# EAGLE board NanoDemultiplexerAndSDcard12Volts (EAGLE 9.5.2)
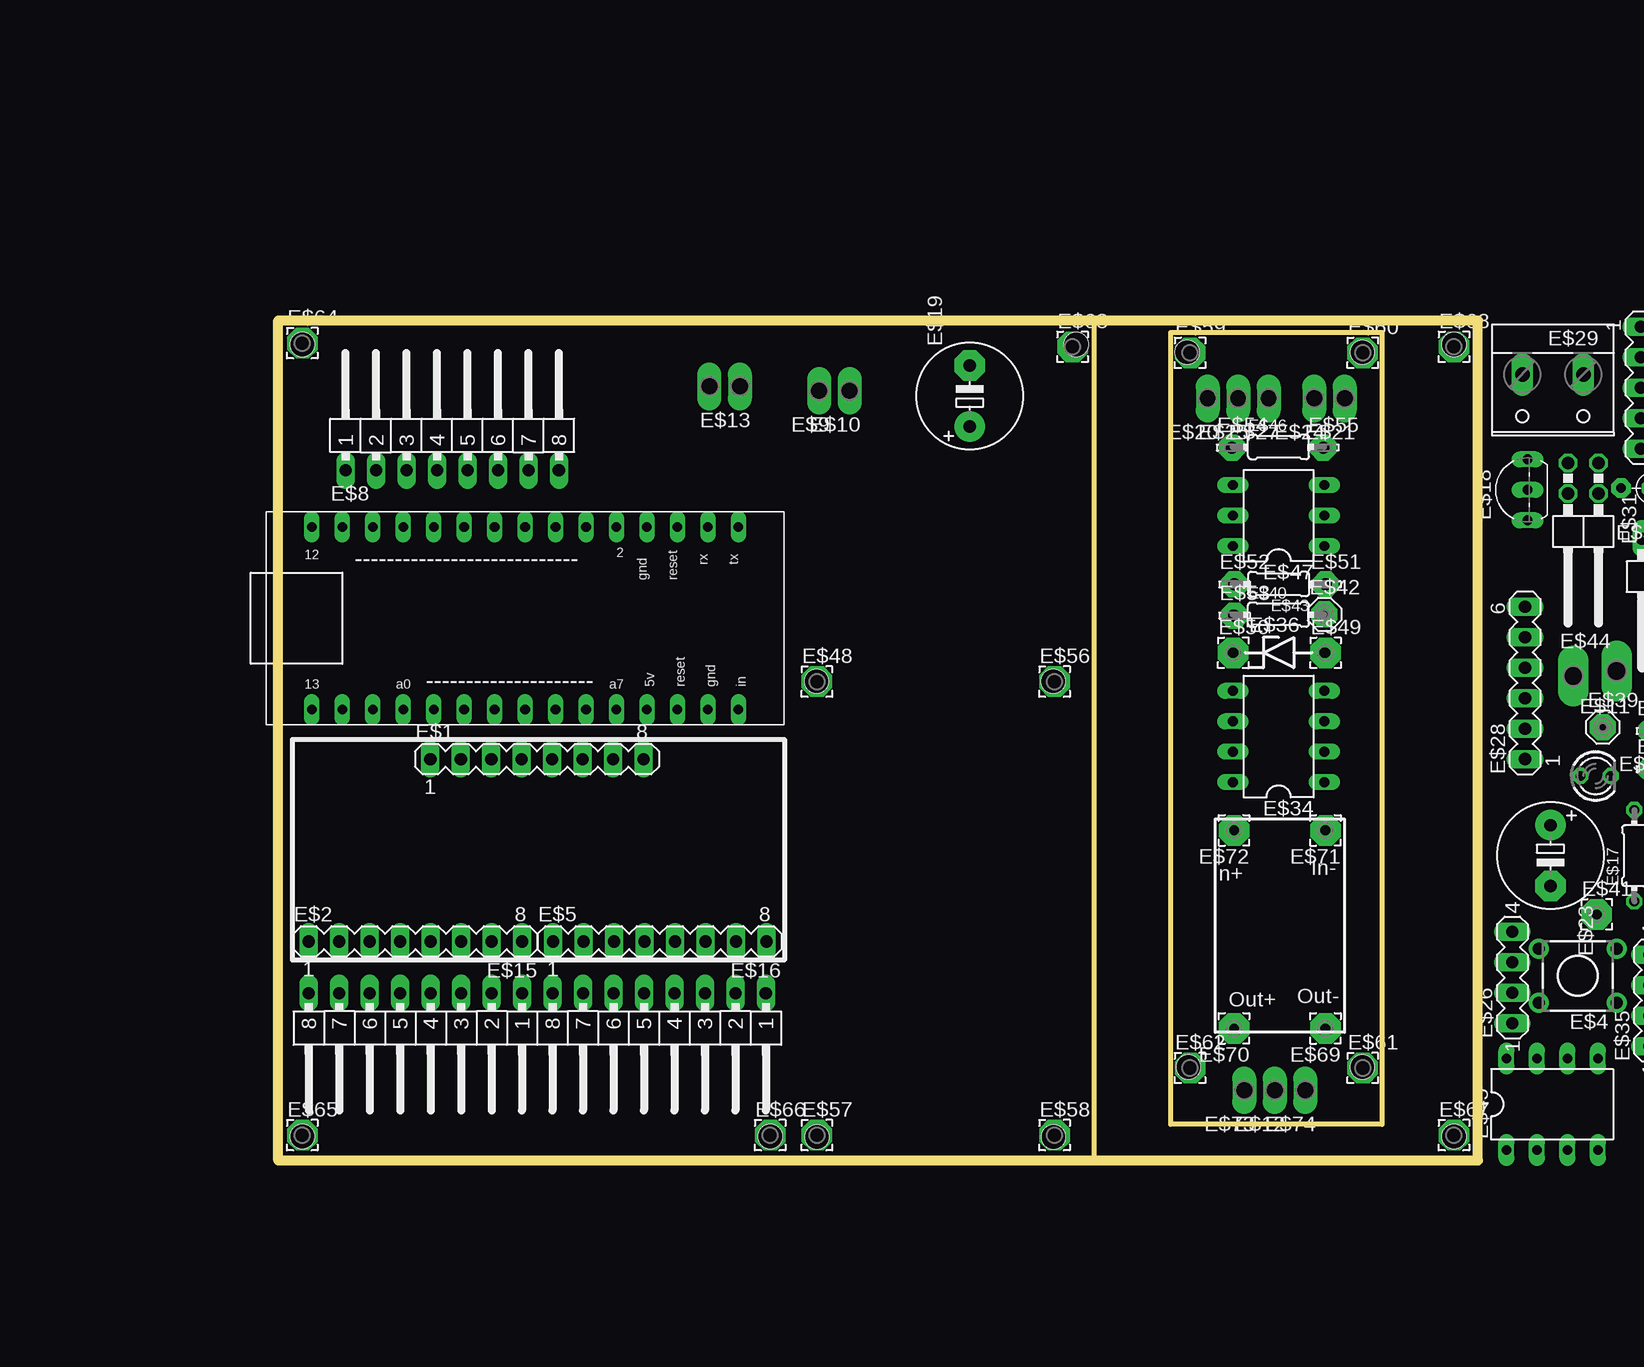
[diagram p0: board, top side]
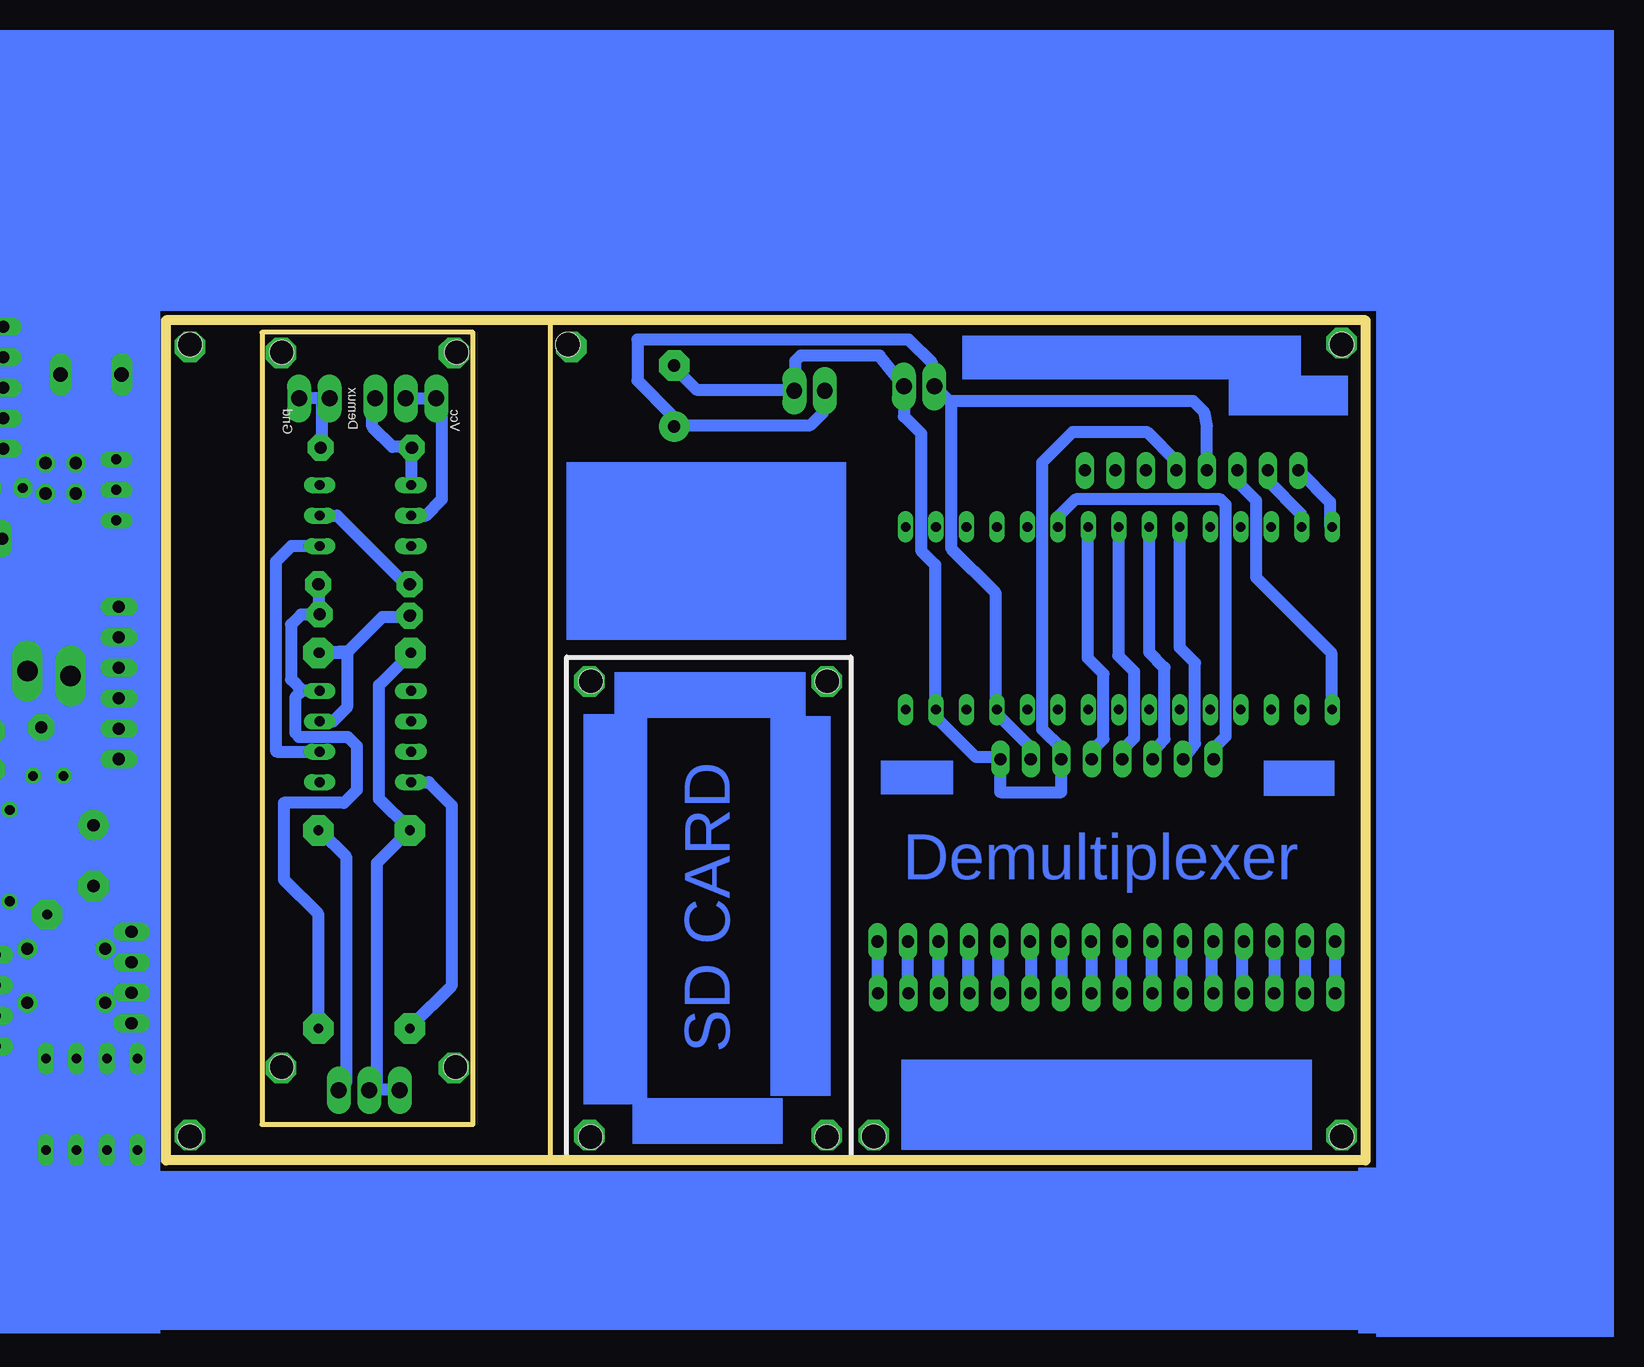
[diagram p1: board, bottom side, seen from below]

Size 100 x 70 mm. Coordinates in mm from the lower left corner, seen from the top.
Outline: 68,70 68,0
Outline: 0,0 0,70 100,70 100,0 0,0
Outline: 74.4,69 92,69 92,3 74.4,3 74.4,69
Copper layers (1*16): Top 0.035mm / dielectric 1.5mm / Bottom 0.035mm
Design rules "default": minimum track width 10mil, minimum drill 24mil, track to track 8mil, track to pad 8mil, pad to pad 8mil, via to via 8mil, smd to smd 8mil, copper to edge 40mil, drill to drill 8mil, minimum pad ring 10mil, minimum via ring 8mil, stop-mask expansion 4mil, vias tented up to drill 0mil, thermal gap 10mil
Holes 2 mm at 64.59,39.94 64.6,1.95 44.9,1.95 44.87,39.94 2,68 2,2 98,68 75.86,7.79 90.36,7.79 90.36,67.34 75.76,67.34 98,2 66.5,68 41,2

## Footprints (pad centres in the part's own frame; a part is rotated, then mirrored left to right if it is on the bottom)
MA08-1 = drill 1.016 long: 1 -8.89,0; 2 -6.35,0; 3 -3.81,0; 4 -1.27,0; 5 1.27,0; 6 3.81,0; 7 6.35,0; 8 8.89,0
MA05-1 = drill 1.016 long: 1 -5.08,0; 2 -2.54,0; 3 0,0; 4 2.54,0; 5 5.08,0
TL1105 = drill 1 pad 1.676: 1 -2.25,3.25; 2 2.25,3.25; 3 -2.25,-3.25; 4 2.25,-3.25
LED3MM = drill 0.813 octagon: A -1.27,0; K 1.27,0
ARDUINO-NANO = drill 0.8 long: P$2 -17.78,7.62; P$4 -15.24,7.62; P$5 -12.7,7.62; P$8 -10.16,7.62; P$9 -7.62,7.62; P$12 -5.08,7.62; P$13 -2.54,7.62; P$16 0,7.62; P$17 2.54,7.62; P$20 5.08,7.62; P$21 7.62,7.62; P$24 10.16,7.62; P$25 12.7,7.62; P$28 15.24,7.62; P$29 17.78,7.62; P$31 -17.78,-7.62; P$34 -15.24,-7.62; P$35 -12.7,-7.62; P$38 -10.16,-7.62; P$39 -7.62,-7.62; P$42 -5.08,-7.62; P$43 -2.54,-7.62; P$46 0,-7.62; P$47 2.54,-7.62; P$50 5.08,-7.62; P$51 7.62,-7.62; P$54 10.16,-7.62; P$55 12.7,-7.62; P$58 15.24,-7.62; P$59 17.78,-7.62
MA08-1W = drill 1.016 long: 1 -8.89,0; 2 -6.35,0; 3 -3.81,0; 4 -1.27,0; 5 1.27,0; 6 3.81,0; 7 6.35,0; 8 8.89,0
P1-13Y = drill 1.321 pad 1.905 long: TP 0,0
P1-17Y = drill 1.702 pad 2.121 long: TP 0,0
0204/7 = drill 0.813 octagon: 1 -3.81,0; 2 3.81,0
TO92- = drill 0.813 long: 1 2.54,0; 2 0,0; 3 -2.54,0
E5-8,5 = drill 1.016 pad 2.54: + -2.54,0 | drill 1.016 pad 2.54 octagon: - 2.54,0
1X01/90 = drill 1.016 long: 1 -1.27,-3.81
MA04-1 = drill 1.016 long: 1 -3.81,0; 2 -1.27,0; 3 1.27,0; 4 3.81,0
MA06-1 = drill 1.016 long: 1 -6.35,0; 2 -3.81,0; 3 -1.27,0; 4 1.27,0; 5 3.81,0; 6 6.35,0
W237-132 = drill 1.194 long: 1 -2.54,-0.635; 2 2.54,-0.635
RS-2,5 = drill 0.813 pad 1.6 octagon: 1 -1.27,0; 2 1.27,0
2X02/90 = drill 1.016 octagon: 1 -1.27,-6.35; 2 -1.27,-3.81; 3 1.27,-6.35; 4 1.27,-3.81
DIL08 = drill 0.813 long: 1 -3.81,-3.81; 2 -1.27,-3.81; 3 1.27,-3.81; 4 3.81,-3.81; 5 3.81,3.81; 6 1.27,3.81; 7 -1.27,3.81; 8 -3.81,3.81
ZDIO-7.5 = drill 0.813 octagon: A 3.81,0; C -3.81,0
LSP10 = drill 1.016 pad 2.159 octagon: MP 0,0
LSP11 = drill 1.118 pad 2.159 octagon: MP 0,0
MCS10B = drill 1.016 pad 2.159 octagon: MP 0,0
2,54/0,8 = drill 0.813 pad 2.54 octagon: 1 0,0
DIL06 = drill 0.813 long: 1 -2.54,-3.81; 2 0,-3.81; 3 2.54,-3.81; 4 2.54,3.81; 5 0,3.81; 6 -2.54,3.81

## Placement (x,y rotation side)
E$1  [MA08-1]  21.56,33.44 0 top
E$2  [MA08-1]  11.43,18.24 0 top
E$3  [MA05-1]  113.58,64.38 270 top  (outside the outline)
E$4  [TL1105]  108.32,15.38 90 top  (outside the outline)
E$5  [MA08-1]  31.79,18.24 0 top
E$6  [LED3MM]  109.81,32.04 0 top  (outside the outline)
E$7  [ARDUINO-NANO]  20.57,45.18 0 top
E$8  [MA08-1W]  14.5,57.5 0 top
E$9  [P1-13Y]  45.09,64.14 180 top
E$10  [P1-13Y]  47.62,64.14 180 top
E$11  [P1-17Y]  111.55,40.79 180 top  (outside the outline)
E$12  [P1-13Y]  83.06,5.84 180 top
E$13  [P1-13Y]  38.48,64.5 180 top
E$14  [P1-13Y]  35.94,64.5 0 top
E$15  [MA08-1W]  11.43,13.94 180 top
E$16  [MA08-1W]  31.75,13.94 180 top
E$17  [0204/7]  113.03,25.4 90 top  (outside the outline)
E$18  [TO92-]  104.14,55.88 90 top  (outside the outline)
E$19  1000uF  [E5-8,5]  57.63,63.7 90 top
E$20  [P1-13Y]  77.47,63.5 180 top
E$21  [P1-13Y]  88.9,63.5 180 top
E$22  [1X01/90]  112.39,48.01 180 top  (outside the outline)
E$23  [E5-8,5]  106.05,25.4 270 top  (outside the outline)
E$24  [P1-13Y]  86.36,63.5 180 top
E$25  [P1-13Y]  80.01,63.5 180 top
E$26  [MA04-1]  102.87,15.24 90 top
E$27  [P1-13Y]  82.55,63.5 180 top
E$28  [MA06-1]  103.93,39.79 90 top  (outside the outline)
E$29  [W237-132]  106.25,64.85 180 top  (outside the outline)
E$30  [RS-2,5]  113.2,56.03 180 top  (outside the outline)
E$31  [2X02/90]  108.78,51.77 180 top  (outside the outline)
E$34  Attiny85  [DIL08]  83.38,35.33 90 top
E$35  [MA04-1]  114.3,13.34 90 top  (outside the outline)
E$36  zener 2.4  [ZDIO-7.5]  83.38,42.31 0 top
E$37  [LSP10]  114.5,35.8 0 top  (outside the outline)
E$38  [LSP11]  114.5,32.6 0 top  (outside the outline)
E$39  [MCS10B]  110.4,36.1 0 top  (outside the outline)
E$40  1k  [0204/7]  83.38,45.48 0 top
E$41  [2,54/0,8]  109.9,20.5 0 top  (outside the outline)
E$42  [MCS10B]  87.2,45.5 0 top
E$43  220  [0204/7]  83.38,48.02 180 top
E$44  [P1-17Y]  107.95,40.37 0 top  (outside the outline)
E$45  [DIL08]  106.19,4.68 0 top
E$46  220  [0204/7]  83.38,59.45 0 top
E$47  Til113  [DIL06]  83.38,53.74 90 top
E$48  [2,54/0,8]  44.9,39.9 0 top
E$49  [2,54/0,8]  87.3,42.3 0 top
E$50  [2,54/0,8]  79.61,42.3 0 top
E$51  [LSP10]  87.3,48 0 top
E$52  [LSP10]  79.7,48 0 top
E$53  [LSP10]  79.7,45.4 0 top
E$54  [LSP10]  79.5,59.4 0 top
E$55  [LSP10]  87.1,59.4 0 top
E$56  [2,54/0,8]  64.7,39.9 0 top
E$57  [2,54/0,8]  44.9,2.1 0 top
E$58  [2,54/0,8]  64.7,2.1 0 top
E$59  [2,54/0,8]  76,67.3 0 top
E$60  [2,54/0,8]  90.4,67.3 0 top
E$61  [2,54/0,8]  90.4,7.7 0 top
E$62  [2,54/0,8]  76,7.7 0 top
E$63  [2,54/0,8]  66.2,67.8 0 top
E$64  [2,54/0,8]  2,68.1 0 top
E$65  [2,54/0,8]  2,2.1 0 top
E$66  [2,54/0,8]  41,2.1 0 top
E$67  [2,54/0,8]  98,2.1 0 top
E$68  [2,54/0,8]  98,67.8 0 top
E$69  [2,54/0,8]  87.29,10.99 180 top
E$70  [2,54/0,8]  79.67,10.99 180 top
E$71  [2,54/0,8]  87.29,27.5 180 top
E$72  [2,54/0,8]  79.67,27.5 180 top
E$73  [P1-13Y]  80.52,5.84 180 top
E$74  [P1-13Y]  85.6,5.84 180 top

## Library data of the parts
E$1-E$3 E$5 E$8 E$15 E$16 E$26 E$28 E$35 = con-lstb
E$4 = switch
E$6 = led
E$7 = LSGPackages
E$9-E$14 E$20 E$21 E$24 E$25 E$27 E$44 E$73 E$74 = testpad
E$17 E$40 E$43 E$46 = eagle-ltspice
E$18 = transistor-fet
E$19 E$23 E$36 = ref-packages-longpad
E$22 E$31 = pinhead
E$29 = con-wago-508
E$30 = discrete
E$34 E$45 = 74xx-us
E$37-E$39 E$42 E$51-E$55 = solpad
E$41 E$48-E$50 E$56-E$72 = wirepad
E$47 = ic-package

## Nets
0V: E$71.1 E$74.TP
5V: E$1.7 E$7.P$54 E$8.4 E$9.TP E$14.TP E$19.+
12V: E$12.TP E$36.C E$72.1 E$73.TP
B+: E$34.8 E$70.1
B-: E$34.4 E$40.2 E$43.1 E$69.1
GND: E$1.6 E$1.8 E$7.P$58 E$8.5 E$10.TP E$13.TP E$19.-
S$2: E$2.1 E$15.8
S$3: E$1.1 E$7.P$20
S$4: E$1.5 E$7.P$17
S$5: E$1.4 E$7.P$16
S$7: E$1.3 E$7.P$13
S$8: E$1.2 E$7.P$12
S$9: E$47.5
S$10: E$34.3 E$36.A E$40.1
S$11: E$6.A E$6.K
S$12: E$2.2 E$15.7
S$13: E$2.3 E$15.6
S$14: E$2.4 E$15.5
S$15: E$2.5 E$15.4
S$16: E$2.6 E$15.3
S$17: E$2.7 E$15.2
S$18: E$2.8 E$15.1
S$19: E$5.1 E$16.8
S$20: E$5.2 E$16.7
S$21: E$5.3 E$16.6
S$22: E$5.4 E$16.5
S$23: E$5.5 E$16.4
S$24: E$5.6 E$16.3
S$25: E$5.7 E$16.2
S$26: E$5.8 E$16.1
S$27: E$7.P$2 E$8.1
S$28: E$7.P$4 E$8.2
S$29: E$7.P$31 E$8.3
S$32: E$21.TP E$24.TP E$46.2
S$33: E$20.TP E$25.TP
S$40: E$34.2 E$47.1
S$41: E$43.2 E$47.2
S$44: E$27.TP E$46.1 E$47.4

## Tracks (layer width: path | path; a pad name or v marks a point on that pad's centre or on a via)
0V
  Bottom 0.254: 87.1,27.43 E$71.1
  Bottom 1.016: 87.1,27.43 85,25.33 85,6.44 E$74.TP
5V
  Bottom 1.016: E$1.7 27.91,34.4 30.63,37.12 30.63,37.49 30.86,37.72 | E$9.TP 45.26,64.01 45.26,62.28 46.28,61.27 57.61,61.27 E$19.+ 57.84,61.27 57.84,62.1 60.71,64.97 60.71,68.39 38.09,68.39 36.12,66.42 36.12,64.69 E$14.TP 35.89,64.47 34.61,63.18 34.55,63.18 | 30.86,37.72 30.86,47.34 34.55,51.02 34.55,63.18 | 34.55,63.18 34.55,63.28 14.38,63.28 13.5,62.4 13.23,61.09 E$8.4 | 30.86,37.72 E$7.P$54
12V
  Bottom 0.254: 82.98,5.94 82.43,5.94 | 81.38,5.94 80.7,5.94 E$73.TP | 79.78,42.05 79.78,42.29 E$36.C | 79.78,27.66 E$72.1 79.78,27.43
  Bottom 1.016: 82.98,5.94 E$12.TP | 79.78,42.05 82.23,39.6 82.23,30.11 79.78,27.66 | 79.78,27.43 82.43,24.78 82.43,5.94 81.38,5.94 E$73.TP
B+
  Bottom 0.254: 79.55,11.2 E$70.1
  Bottom 1.016: E$34.8 78.1,31.52 76.15,29.57 76.15,14.6 79.55,11.2
B-
  Bottom 0.254: 89.22,35.62 88.9,35.3 | 87.33,11.2 E$69.1
  Bottom 1.016: E$43.1 87.24,47.8 87.24,45.52 E$40.2 88.75,45.48 89.58,44.65 89.58,40.09 88.63,39.13 | E$34.4 88.63,39.13 | 87.33,11.2 87.33,20.57 90.17,23.43 90.17,29.8 85.15,29.8 84.1,30.85 84.1,34.55 84.85,35.3 88.9,35.3 | 89.22,35.62 89.22,38.59 88.63,39.13
GND
  Bottom 1.016: E$8.5 15.79,58.26 18.24,60.71 24.41,60.71 26.95,58.17 26.95,35.9 25.38,34.33 E$1.6 25.37,30.7 30.45,30.7 E$1.8 30.63,33.6 32.48,33.6 35.81,36.94 35.89,37.26 35.89,37.49 E$7.P$58 35.89,37.72 35.89,49.65 37.06,50.82 37.06,60.58 38.48,62 E$13.TP 40.5,67.06 47.09,67.06 47.55,66.6 47.55,64.74 | E$19.- 57.61,66.06 55.78,64.24 47.78,64.24 E$10.TP 47.55,64.24 47.55,64.74 | 47.55,64.74 47.62,64.64
S$2
  Bottom 1.016: E$2.1 2.52,18.06 2.52,13.95 E$15.8
S$3
  Bottom 1.016: E$7.P$20 25.65,53.62 24.17,55.09 12.1,55.09 11.68,54.67 11.68,35.32 12.67,34.32 E$1.1
S$4
  Bottom 1.016: E$7.P$17 23.17,52.74 23.17,41.88 21.85,40.55 21.85,35.11 22.83,34.12 E$1.5
S$5
  Bottom 1.016: E$7.P$16 20.62,52.74 20.62,42.07 19.29,40.73 19.29,35.2 20.29,34.2 E$1.4
S$7
  Bottom 1.016: E$7.P$13 18.05,52.78 18.05,42.37 16.76,41.07 16.76,35.1 17.75,34.01 E$1.3
S$8
  Bottom 1.016: E$7.P$12 15.49,42.72 14.22,41.45 14.22,34.75 E$1.2
S$9
  Bottom 1.016: 77.22,63.5 77,63.29 77,55.07 78.33,53.74 E$47.5
S$10
  Bottom 1.016: E$40.1 79.7,45.29 81.94,45.29 84.81,42.42 E$36.A 84.91,42.31 84.91,37.76 86.08,36.59 E$34.3
S$11
  Bottom 0.254: E$6.A 108.58,32.23 110.87,32.23 E$6.K
S$12
  Bottom 1.016: E$2.2 5.03,18.06 5.03,13.95 E$15.7
S$13
  Bottom 1.016: E$2.3 7.54,18.06 7.54,13.95 E$15.6
S$14
  Bottom 1.016: E$2.4 10.29,18.06 10.29,13.95 E$15.5
S$15
  Bottom 1.016: E$2.5 12.8,18.06 12.8,13.95 E$15.4
S$16
  Bottom 1.016: E$2.6 15.32,18.06 15.32,13.95 E$15.3
S$17
  Bottom 1.016: E$2.7 17.83,18.06 17.83,13.95 E$15.2
S$18
  Bottom 1.016: E$2.8 20.34,18.06 20.34,13.95 E$15.1
S$19
  Bottom 1.016: E$16.8 22.86,18.06 E$5.1
S$20
  Bottom 1.016: E$16.7 25.38,13.95 25.38,18.06 E$5.2
S$21
  Bottom 1.016: E$16.6 27.89,13.95 27.89,18.06 E$5.3
S$22
  Bottom 1.016: E$16.5 30.63,13.95 30.63,18.06 E$5.4
S$23
  Bottom 1.016: E$16.4 33.15,13.95 33.15,18.06 E$5.5
S$24
  Bottom 1.016: E$16.3 35.66,13.95 35.66,18.06 E$5.6
S$25
  Bottom 1.016: E$16.2 38.18,13.95 38.18,18.06 E$5.7
S$26
  Bottom 1.016: E$16.1 40.69,13.95 40.69,18.06 E$5.8
S$27
  Bottom 1.016: E$7.P$2 2.97,52.81 2.97,54.86 5.49,57.38 E$8.1
S$28
  Bottom 1.016: E$8.2 8.15,56.63 5.39,53.86 5.39,52.8 E$7.P$4
S$29
  Bottom 1.016: E$8.3 10.69,56.55 9.14,55.01 9.14,48.59 2.87,42.32 2.87,37.63 E$7.P$31
S$32
  Bottom 0.254: E$24.TP 86.37,63.51 86.41,63.55
  Bottom 1.016: E$21.TP 87.01,63.5 87.01,62.88 | 87.01,62.88 86.37,63.51 | 87.01,62.88 87.01,59.46 E$46.2
S$33
  Bottom 1.016: E$25.TP E$20.TP
S$40
  Bottom 1.016: E$34.2 87.21,34.07 90.77,34.07 90.85,34.15 90.85,49.9 89.55,51.2 E$47.1
S$41
  Bottom 1.016: E$47.2 85.73,53.74 80.03,48.03 79.7,48.03 E$43.2
S$44
  Bottom 0.254: 82.81,63.32 82.98,63.32 E$27.TP
  Bottom 1.016: E$46.1 79.56,59.44 79.56,56.29 E$47.4 | 79.7,59.46 E$46.1 | E$46.1 81.12,59.45 82.81,61.15 82.81,63.24 E$27.TP | 82.81,63.26 82.81,63.32 82.81,63.34
(copper drawn outside any net)
  shapes: Bottom area x15

## Text on the board
Bottom: SD CARD | Demultiplexer
tPlace: In+ | In- | Out+ | Out-
bPlace: Vcc | Demux | Gnd
tTest: Gnd
bTest: gnd | vcc | vcc | gnd | vcc | gnd | Demultiplexer | SD card | Tx | Vcc battery | Gnd battery